# Altium PCB modFOC_ESC.PcbDoc (part 1 of 2)
Units mm, origin at the board's own origin, x right, y up, seen from the top; angles counter-clockwise.
Board outline 82 x 45 mm, 4 copper layers (Top Layer, Mid Layer 1, Mid Layer 2, Bottom Layer), stack 1.531 mm thick; 112 components, 80 nets, 521 pads, 343 vias.
Unrouted connection lines stored in the file: 79.
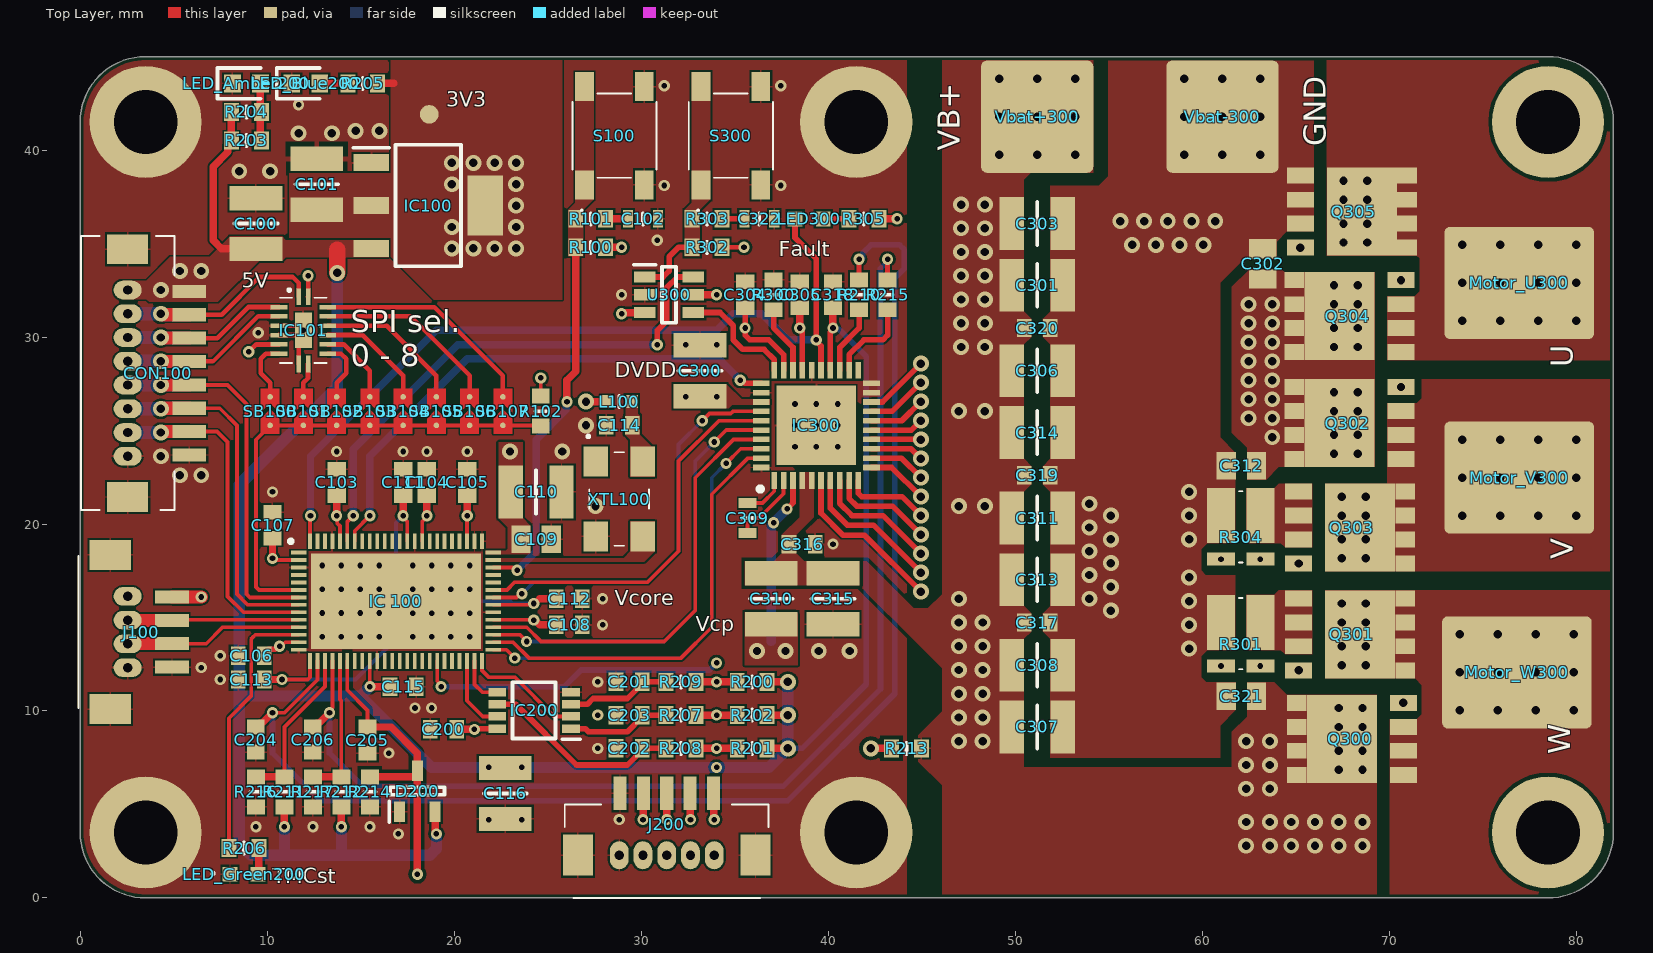
[diagram p0: Top Layer view]
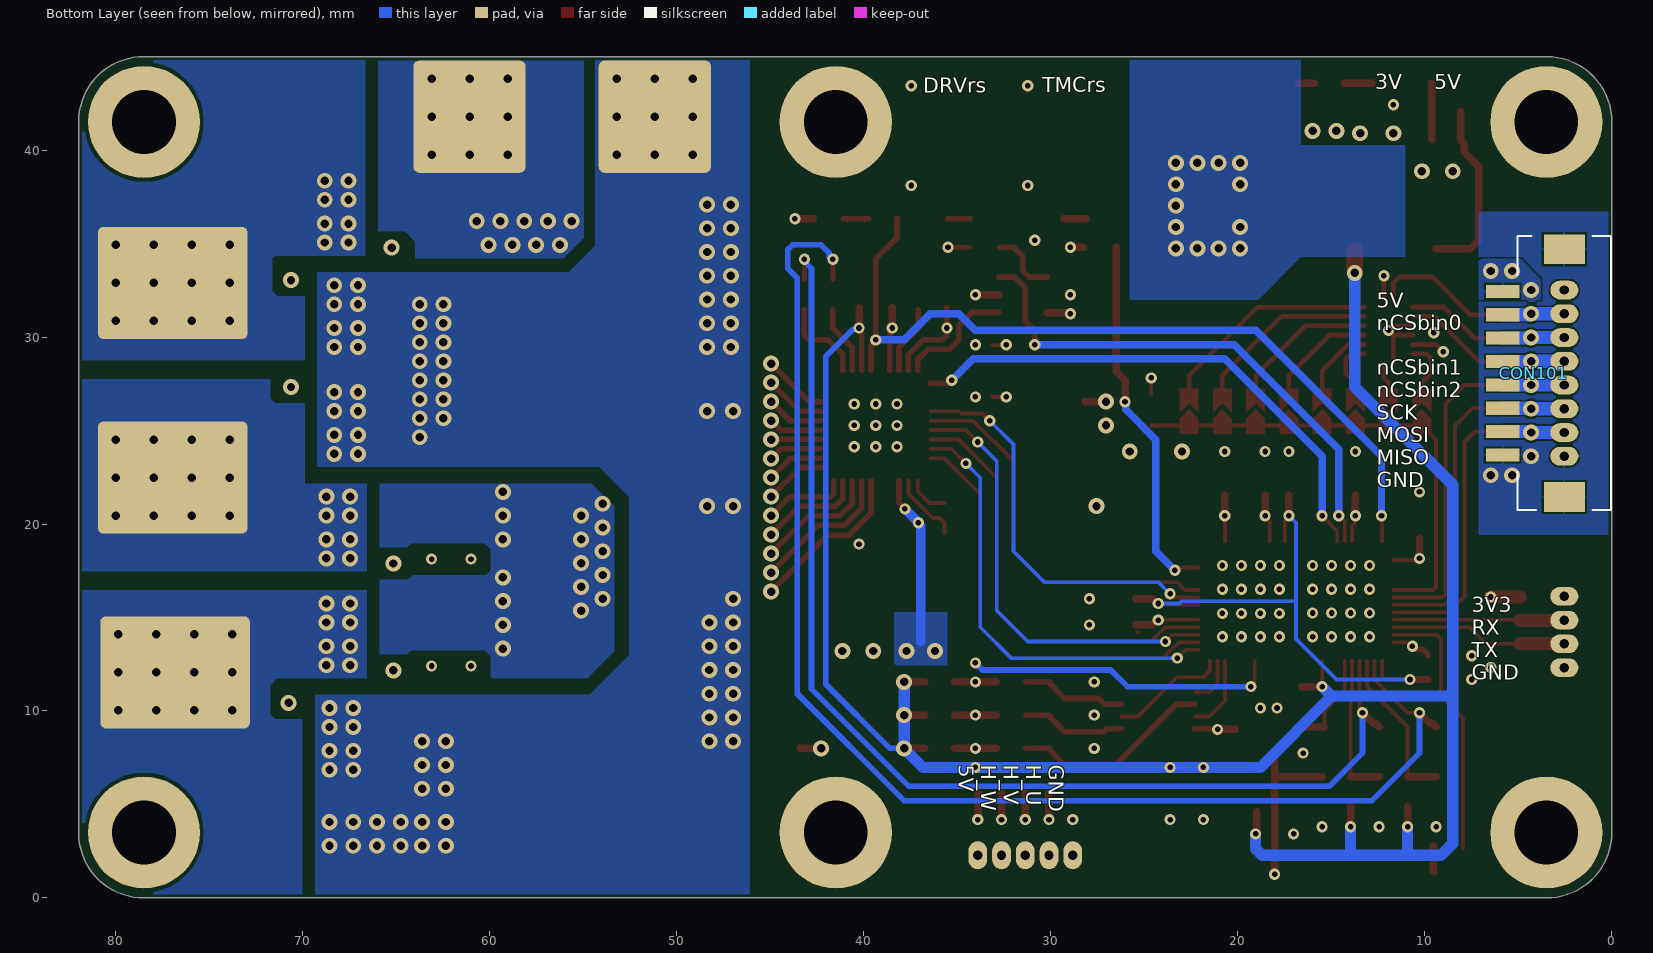
[diagram p1: Bottom Layer view, seen from below]
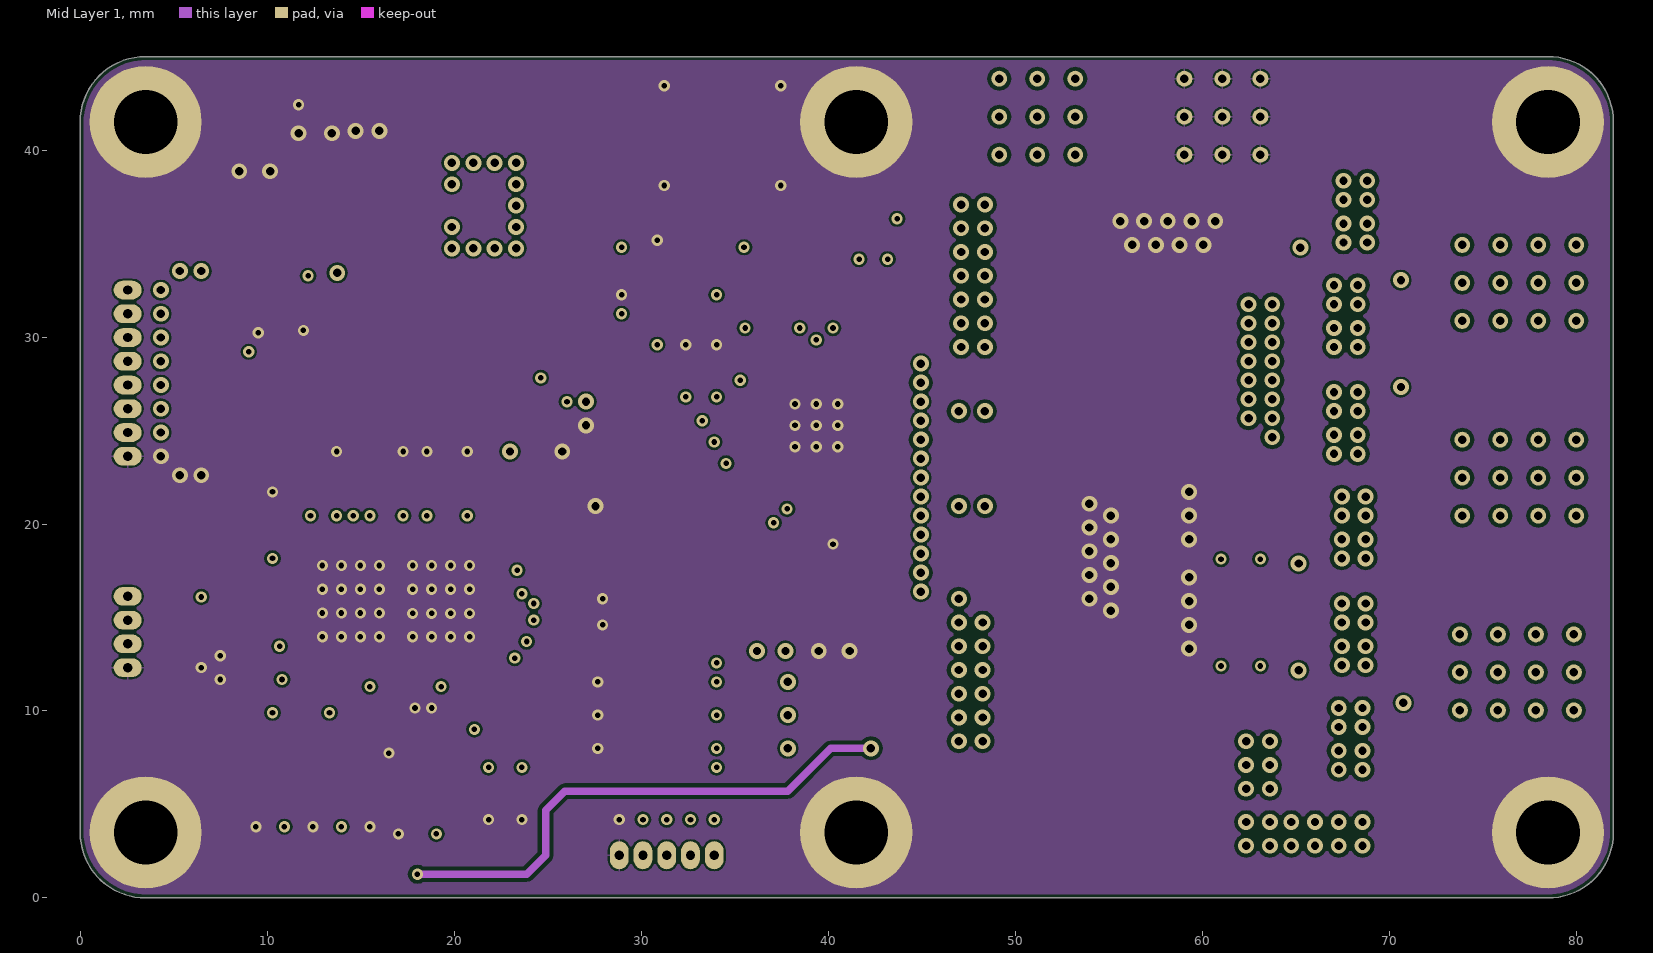
[diagram p2: Mid Layer 1]
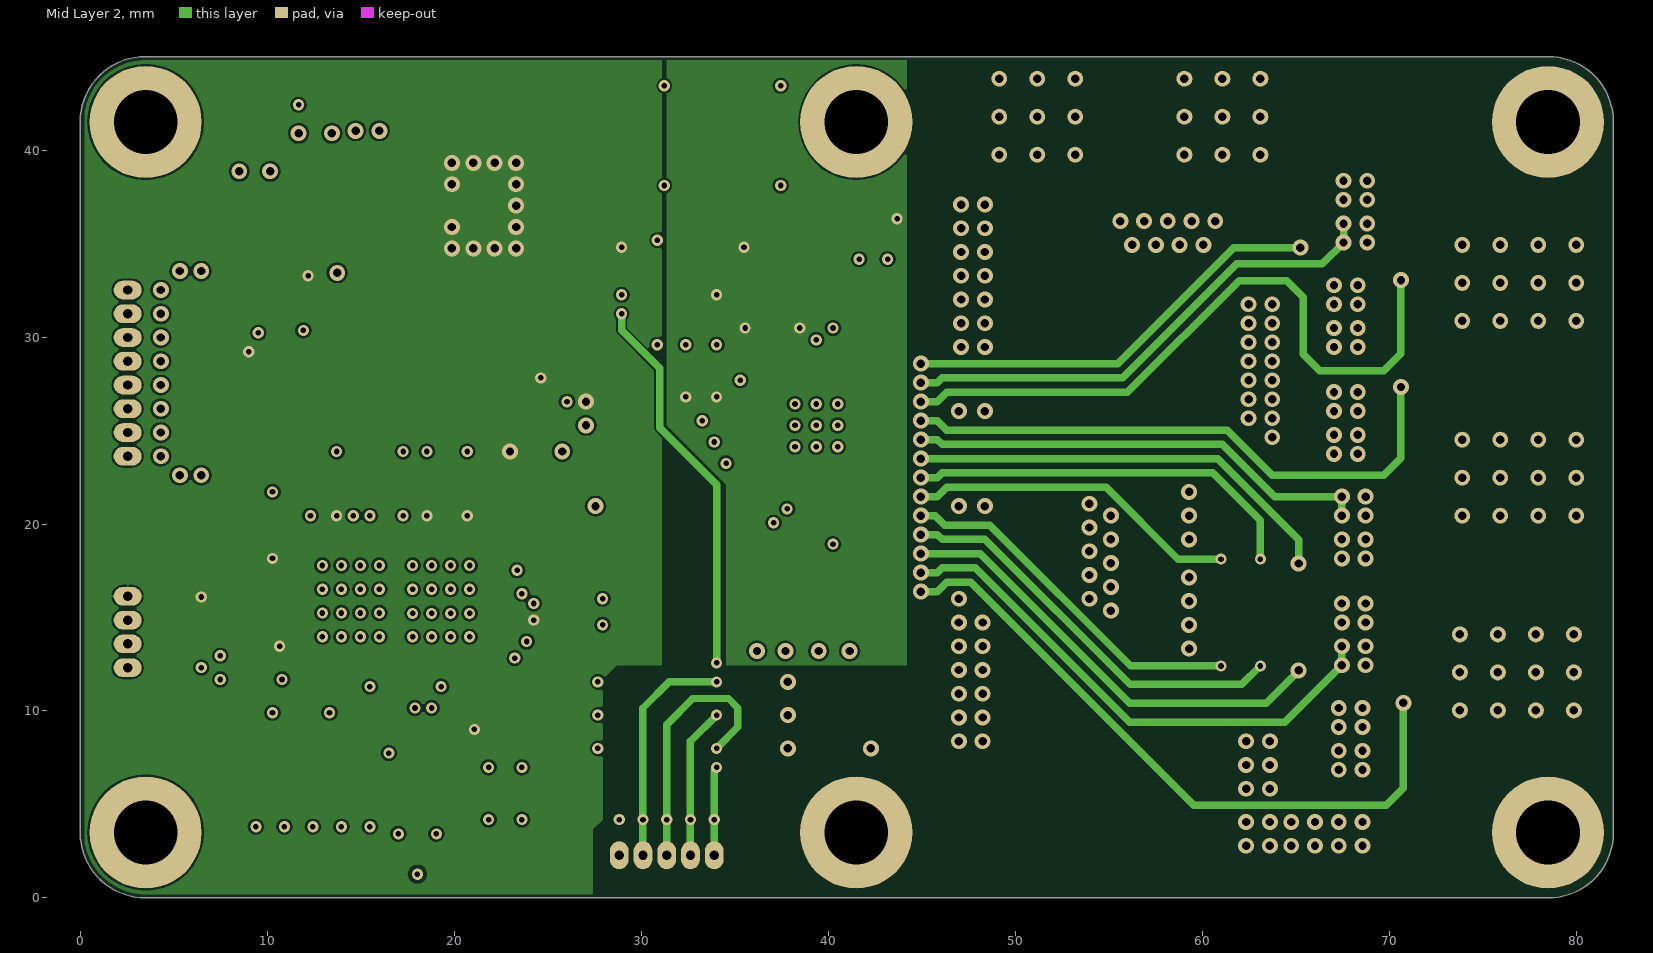
[diagram p3: Mid Layer 2]
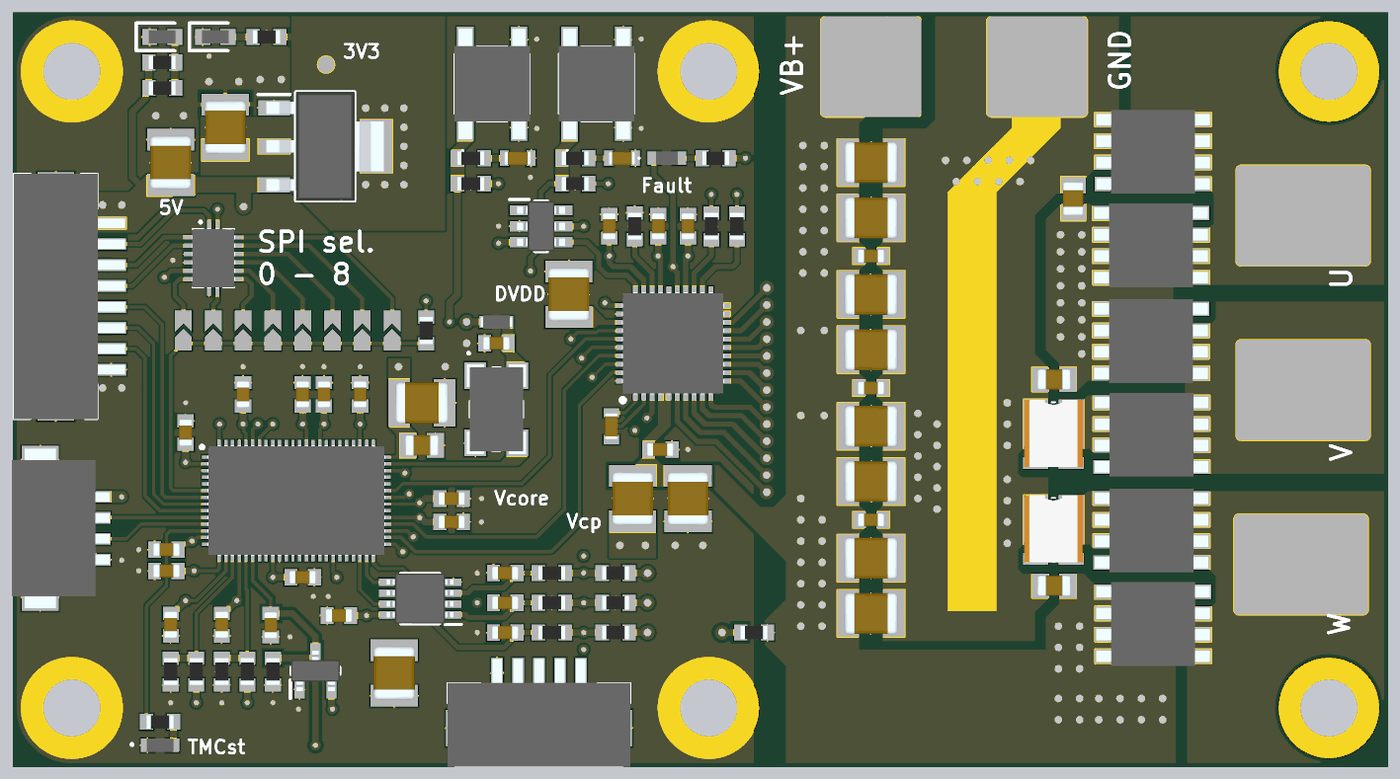
[diagram p5: 3D render of the assembled board from above, using the file's embedded part models]

## Layer stack, top to bottom
Top Solder: solder mask 0.0127, Solder Resist, Dk 3.8
Top Layer: signal copper 0.035
Dielectric 1: prepreg 0.1803, 7628, Dk 4.6
Mid Layer 1: signal copper 0.0175
Core: core 1.065, FR-4, Dk 4.5
Mid Layer 2: signal copper 0.0175
Dielectric 2: prepreg 0.1803, 7628, Dk 4.6
Bottom Layer: signal copper 0.035
Bottom Solder: solder mask 0.0127, Solder Resist, Dk 3.8

## Board outline
0,3.5 ccw(c3.5,3.5) 3.5,0 78.5,0 ccw(c78.5,3.5) 82,3.5 82,41.5 ccw(c78.5,41.5) 78.5,45 3.5,45 ccw(c3.5,41.5) 0,41.5

## Design rules (kind name [scope] priority, off if disabled: settings)
BoardOutlineClearance [All] p1: gap=0.2 ignorepadtopadclearanceinfootprint=FALSE
Clearance Clearance_VB [(InNet('VB+') oR InNet('SHA') oR InNet('SHB') oR InNet('SHC') oR InNet('ADC_VM'))] p1: gap=0.2 ignorepadtopadclearanceinfootprint=FALSE except(0.102: Arc-Arc Arc-Track Arc-SMDPad Arc-THPad Arc-Text Track-Track Track-SMDPad Track-THPad Track-Text SMDPad-SMDPad SMDPad-THPad SMDPad-Text THPad-THPad THPad-Text Text-Text; 0.127: Arc-Via Track-Via SMDPad-Via THPad-Via Via-Via Via-Text; 0.25: Arc-Hole Track-Hole SMDPad-Hole THPad-Hole Via-Hole Text-Hole)
Clearance [All] p2: gap=0.102 ignorepadtopadclearanceinfootprint=FALSE except(0.127: Arc-Via Track-Via SMDPad-Via THPad-Via Via-Via Via-Fill Via-Poly Via-Region Via-Text; 0.25: Arc-Hole Track-Hole SMDPad-Hole THPad-Hole Via-Hole Fill-Hole Poly-Hole Region-Hole Text-Hole)
ComponentClearance [All] p1: gap=0.102 collisioncheckmode=3 verticalgap=0.102 showdistances=TRUE
DiffPairsRouting [All] p1: maxlimit=0.102 minlimit=0.102 mostfreqgap=0.102 toplayer_minwidth=0.102 toplayer_maxwidth=1816.048 toplayer_prefwidth=0.102 midlayer1_minwidth=0.102 midlayer1_maxwidth=1816.048 midlayer1_prefwidth=0.102 midlayer2_minwidth=0.102 midlayer2_maxwidth=1816.048 midlayer2_prefwidth=0.102 bottomlayer_minwidth=0.102 bottomlayer_maxwidth=1816.048 bottomlayer_prefwidth=0.102 maxuncoupledlength=12.7
Height [All] p1: minheight=0 maxheight=1816.048 prefheight=12.7
HoleSize [All] p1: absolutevalues=TRUE maxlimit=6.3 minlimit=0.2 maxpercent=80.000 minpercent=20.000
HoleToHoleClearance [All] p1: gap=0.25 allowstackedmicrovias=FALSE
MinimumAnnularRing [All] p1: minimumring=0.076
MinimumSolderMaskSliver [All] p1: minsoldermaskwidth=0.098
PlaneClearance [All] p1: clearance=0.102
PlaneConnect PlaneConnectPowerPads [InPadClass('PowerPads')] p1: planeconnectstyle=Direct reliefexpansion=0.508 reliefentries=4 reliefconductorwidth=0.254 reliefairgap=0.254
PlaneConnect [All] p2: pad.planeconnectstyle=Relief pad.reliefexpansion=0.3 pad.reliefentries=4 pad.reliefconductorwidth=0.102 pad.reliefairgap=0.102 via.planeconnectstyle=Direct via.reliefexpansion=0.3 via.reliefentries=4 via.reliefconductorwidth=0.127 via.reliefairgap=0.127
PolygonConnect PolygonConnectPowerPads [All vs (InPadClass('PowerPads'))] p1: connectstyle=Direct reliefconductorwidth=0.254 reliefentries=4 polygonreliefangle="90 Angle" airgapwidth=0.254
PolygonConnect [All] p2: thpad.connectstyle=Relief thpad.reliefconductorwidth=0.102 thpad.reliefentries=4 thpad.polygonreliefangle="90 Angle" thpad.airgapwidth=0.102 smdpad.connectstyle=Relief smdpad.reliefconductorwidth=0.102 smdpad.reliefentries=4 smdpad.polygonreliefangle="90 Angle" smdpad.airgapwidth=0.102 via.connectstyle=Direct via.reliefconductorwidth=0.127 via.reliefentries=4 via.polygonreliefangle="90 Angle" via.airgapwidth=0.127
RoutingVias [All] p1: holewidth=0.2 width=0.45 viastyle="Through Hole" minholewidth=0.2 minwidth=0.45 maxholewidth=6.3 maxwidth=6.55
SilkToSilkClearance [All] p1: silktosilkclearance=0
SilkToSolderMaskClearance [IsPad] p1: minsilkscreentomaskgap=0.102 clearancetoexposedcopper=TRUE
SolderMaskExpansion "SolderMaskExpansion Vias" [IsVia] p1: expansion=0.102 istentingtop=TRUE
SolderMaskExpansion [All] p2: expansion=0.05 istentingtop=FALSE
Width [All] p1: maxlimit=50 minlimit=0.102 preferedwidth=0.2 midlayer1_minwidth=0.127 midlayer2_minwidth=0.127 minimp=50.000000 maximp=50.000000 favimp=50.000000
20 further rules are at their usual default settings.

## Classes and differential pairs
component class modFOC-Powerstage: C300 C301 C302 C303 C304 C305 C306 C307 C308 C309 C310 C311 C312 C313 C314 C315 C316 C317 C318 C319 C320 C321 C322 IC300 IC? LED300 Motor_U300 Motor_V300 Motor_W300 Q300 Q301 Q302 Q303 Q304 Q305 R300 R301 R302 R303 R304 R305 RADJ1 RT1 S300 U300 Vbat+300 Vbat-300
component class modFOC-Sensing: C200 C201 C202 C203 C204 C205 C206 D200 IC200 J200 LED_Amber200 LED_Blue200 LED_Green200 R200 R201 R202 R203 R204 R205 R206 R207 R208 R209 R210 R211 R212 R213 R214 R215 R216 R217
component class modFOC-Motion_Controller: C100 C101 C102 C103 C104 C105 C106 C107 C108 C109 C110 C111 C112 C113 C114 C115 C116 CON100 CON101 IC100 IC101 "IC 100" J100 L100 R100 R101 R102 S100 SB100 SB101 SB102 SB103 SB104 SB105 SB106 SB107 XTL100

## Components (designator, comment, footprint, x,y, rotation, side; value= is the part's Value field where it differs from the comment)
C100 "10uF/63V" CAPC3225X280N 9.398,36.068 r90 top
C101 "10uF/63V" CAPC3225X280N 12.656,38.17 r90 top locked
C102 "4u7/10V" CAPC1608X90N 30.099,36.322 r180 top
C103 "100nF/63V" CAPC1608X97N 13.716,22.225 r270 top
C104 "100nF/63V" CAPC1608X97N 18.542,22.225 r270 top
C105 "100nF/63V" CAPC1608X97N 20.701,22.225 r270 top
C106 "100nF/63V" CAPC1608X97N 9.144,12.954 r0 top
C107 "100nF/63V" CAPC1608X97N 10.287,19.939 r270 top
C108 "100nF/63V" CAPC1608X97N 26.162,14.605 r180 top
C109 "470nF/100V" CAPC2012X140N 24.384,19.177 r180 top
C110 "10uF/63V" CAPC3225X280N 24.384,21.717 r0 top
C111 "100nF/63V" CAPC1608X97N 17.272,22.225 r270 top
C112 "100nF/63V" CAPC1608X97N 26.162,16.002 r180 top
C113 "100nF/63V" CAPC1608X97N 9.144,11.684 r0 top
C114 "100nF/63V" CAPC1608X97N 28.829,25.273 r0 top
C115 "100nF/63V" CAPC1608X97N 17.272,11.303 r180 top
C116 "10uF/63V" CAPC3225X280N 22.733,5.588 r270 top
C200 "100nF/63V" CAPC1608X97N 19.431,9.017 r0 top
C201 "1nF/25V" CAPC1608X97N 29.356,11.557 r180 top
C202 "1nF/25V" CAPC1608X97N 29.356,8.001 r180 top
C203 "1nF/25V" CAPC1608X97N 29.356,9.779 r180 top
C204 "100pF/63V" CAPC1608X87N 9.398,8.474 r90 top
C205 "100nF/63V" CAPC1608X97N 15.367,8.444 r90 top
C206 "100pF/63V" CAPC1608X87N 12.446,8.474 r90 top
C300 "10uF/63V" CAPC3225X280N 33.147,28.194 r270 top
C301 "10uF/63V" CAPC3225X280N 51.181,32.766 r180 top
C302 "470nF/100V" CAPC2012X140N 63.246,33.909 r270 top
C303 "10uF/63V" CAPC3225X280N 51.181,36.068 r180 top
C304 "100nF/63V" CAPC1608X97N 35.56,32.258 r270 top
C305 "100nF/63V" CAPC1608X97N 38.481,32.258 r270 top
C306 "10uF/63V" CAPC3225X280N 51.181,28.194 r180 top
C307 "10uF/63V" CAPC3225X280N 51.181,9.144 r180 top
C308 "10uF/63V" CAPC3225X280N 51.181,12.446 r180 top
C309 "47nF/50V" CAPC1608X90N 35.687,20.32 r90 top
C310 "10uF/63V" CAPC3225X280N 36.957,16.002 r270 top
C311 "10uF/63V" CAPC3225X280N 51.181,20.32 r180 top
C312 "470nF/100V" CAPC2012X140N 62.103,23.114 r0 top
C313 "10uF/63V" CAPC3225X280N 51.181,17.018 r180 top
C314 "10uF/63V" CAPC3225X280N 51.181,24.892 r180 top
C315 "10uF/63V" CAPC3225X280N 40.259,16.002 r90 top
C316 "100nF/63V" CAPC1608X97N 38.608,18.923 r180 top
C317 "100nF/63V" CAPC1608X97N 51.181,14.732 r0 top
C318 "100nF/63V" CAPC1608X97N 40.259,32.258 r270 top
C319 "100nF/63V" CAPC1608X97N 51.181,22.606 r0 top
C320 "100nF/63V" CAPC1608X97N 51.181,30.48 r0 top
C321 "470nF/100V" CAPC2012X140N 62.103,10.795 r0 top
C322 "4u7/10V" CAPC1608X90N 36.322,36.322 r180 top
CON100 "8_PIN" DF13A8P125H21 2.54,28.067 r90 top
CON101 "8_PIN" DF13A8P125H21 2.54,28.067 r270 bottom
D200 "30V/200mA" SOT95P240X110-3N 18.034,5.715 r90 top
IC100 "3V3_LDO" SOT230P700X180-4N 18.613,37.028 r0 top
IC101 "3Bit_BIN/DEC" 74HCT595BQ115 11.938,30.353 r270 top
IC200 "S-Trigger" SOP65P400X110-8N 24.276,10.033 r180 top
IC300 "BLDC_GDriver" QFN50P600X600X80-41N-D 39.37,25.273 r90 top
"IC 100" "Motion Ctrl" QFN40P1050X650X90-77N 16.891,15.875 r0 top
J100 "4_PIN" DF13A4P125H21 2.413,14.224 r90 top
J200 "5_PIN" DF13A5P125H21 31.369,2.794 r180 top
L100 "30R@100MHz/5A" BLM18KG101TH1D 28.829,26.543 r0 top
LED300 "RED/2,2V/2mA" LSL29KG1J21Z 38.989,36.322 r0 top
LED_Amber200 "AMBER/2V/20mA" LEDC1608X55N 8.89,43.561 r0 top
LED_Blue200 "BLUE/2,85V/5mA" LEDC1608X40N 12.065,43.561 r0 top
LED_Green200 "GREEN/2,4V/20mA" LGQ396PS35 8.763,1.27 r0 top
Motor_U300 "PowerPad" POWER_PAD 76.962,32.893 r180 top
Motor_V300 "PowerPad" POWER_PAD 76.962,22.479 r180 top
Motor_W300 "PowerPad" POWER_PAD 76.835,12.065 r180 top
Q300 "N-ch/60V/100A" TPHR9003NLL1Q 68.453,8.509 r90 top
Q301 "N-ch/60V/100A" TPHR9003NLL1Q 67.472,14.097 r270 top
Q302 "N-ch/60V/100A" TPHR9003NLL1Q 68.326,25.4 r90 top
Q303 "N-ch/60V/100A" TPHR9003NLL1Q 67.472,19.812 r270 top
Q304 "N-ch/60V/100A" TPHR9003NLL1Q 68.326,31.115 r90 top
Q305 "N-ch/60V/100A" TPHR9003NLL1Q 67.564,36.703 r270 top
R100 "10k" RESC1608X55N 27.305,34.798 r180 top
R101 "100R" RESC1608X55N 27.305,36.322 r0 top
R102 "10k" RESC1608X55N 24.638,26.035 r90 top
R200 "4k7" RESC1608X55N 35.941,11.557 r180 top
R201 "4k7" RESC1608X55N 35.941,8.001 r180 top
R202 "4k7" RESC1608X55N 35.941,9.779 r180 top
R203 "1k5" RESC1608X55N 8.89,40.513 r180 top
R204 "1k5" RESC1608X55N 8.89,42.037 r180 top
R205 "100R" RESC1608X55N 15.113,43.561 r0 top
R206 "150R" RESC1608X55N 8.763,2.667 r180 top
R207 "4k7" RESC1608X55N 32.131,9.779 r180 top
R208 "4k7" RESC1608X55N 32.131,8.001 r180 top
R209 "4k7" RESC1608X55N 32.131,11.557 r180 top
R210 "100R" RESC1608X55N 41.656,32.258 r270 top
R211 "10k" RESC1608X55N 10.922,5.677 r270 top
R212 "10k" RESC1608X55N 13.97,5.677 r90 top
R213 "100k" RESC1608X55N 44.196,8.001 r0 top
R214 "1k5" RESC1608X55N 15.494,5.677 r90 top
R215 "100R" RESC1608X55N 43.18,32.258 r270 top
R216 "10k" RESC1608X55N 9.398,5.677 r270 top
R217 "10k" RESC1608X55N 12.446,5.677 r270 top
R300 "1M" RESC1608X55N 37.084,32.258 r90 top
R301 "5mR/3W" WSK12161L000FEA 62.066,14.132 r270 top
R302 "10k" RESC1608X55N 33.528,34.798 r180 top
R303 "100R" RESC1608X55N 33.528,36.322 r0 top
R304 "5mR/3W" WSK12161L000FEA 62.066,19.847 r270 top
R305 "470R" RESC1608X55N 41.91,36.322 r0 top
S100 "OFF-(ON)" PTS647SK38SMTR2LFS 28.575,40.767 r90 top
S300 "OFF-(ON)" PTS647SK38SMTR2LFS 34.798,40.767 r90 top
SB100 "Solder Bridge" SOLDER-BRIDGE_R0603-0R 10.16,26.035 r90 top
SB101 "Solder Bridge" SOLDER-BRIDGE_R0603-0R 11.938,26.035 r90 top
SB102 "Solder Bridge" SOLDER-BRIDGE_R0603-0R 13.716,26.035 r90 top
SB103 "Solder Bridge" SOLDER-BRIDGE_R0603-0R 15.494,26.035 r90 top
SB104 "Solder Bridge" SOLDER-BRIDGE_R0603-0R 17.272,26.035 r90 top
SB105 "Solder Bridge" SOLDER-BRIDGE_R0603-0R 19.05,26.035 r90 top
SB106 "Solder Bridge" SOLDER-BRIDGE_R0603-0R 20.828,26.035 r90 top
SB107 "Solder Bridge" SOLDER-BRIDGE_R0603-0R 22.606,26.035 r90 top
U300 "Triple_AND" SOT95P285X140-6N 31.496,32.258 r0 top
Vbat+300 "PW_PAD_SMOL" PW_PAD_SMOL 51.181,41.783 r0 top
Vbat-300 "PW_PAD_SMOL" PW_PAD_SMOL 61.087,41.783 r0 top
XTL100 "25MHz" FOX924B25 28.829,21.336 r270 top

## Footprints (in the part's own frame and the unit in brackets; to place one, negate y for a bottom-side part, rotate by r counter-clockwise, add the part's x,y. Pads: shape width x height; smd on the part's side, far side on the other; paste and mask are expansions set on the pad)
74HCT595BQ115 [mm]
  rect 0.9x0.24 smd: 1(-1.8,-0.25) 8(1.8,-0.25) 9(1.8,0.25) 16(-1.8,0.25)
  rect 0.24x0.9 smd: 2(-1.25,-1.3) 3(-0.75,-1.3) 4(-0.25,-1.3) 5(0.25,-1.3) 6(0.75,-1.3) 7(1.25,-1.3) 10(1.25,1.3) 11(0.75,1.3) 12(0.25,1.3) 13(-0.25,1.3) 14(-0.75,1.3) 15(-1.25,1.3)
  rect 1.9x0.9 smd: 17(0,0)
  silkscreen extent -2.21,-1.25 1.75,1.25, body extent -1.8,-1.3 1.8,1.3, height 1
BLM18KG101TH1D [mm]
  rect 0.65x0.7 smd: 1(-0.675,0) 2(0.675,0)
  silkscreen extent 0,-0.3 0,0.3, body extent -0.93,-0.4 0.93,0.4, height 0.85
CAPC1608X87N [mm]
  rect 0.8x0.94 smd: 1(-0.67,0) 2(0.67,0)
  body extent -0.8,-0.4 0.8,0.4, height 0.87
CAPC1608X90N [mm]
  rect 0.54x0.94 smd: 1(-0.8,0) 2(0.8,0)
  silkscreen extent 0,-0.3 0,0.3, body extent -0.8,-0.4 0.8,0.4, height 0.9
CAPC1608X97N [mm]
  rect 0.78x0.98 smd: 1(-0.7,0) 2(0.7,0)
  body extent -0.8,-0.4 0.8,0.4, height 0.97
CAPC2012X140N [mm]
  rect 1.02x1.47 smd: 1(-0.81,0) 2(0.81,0)
  body extent -1,-0.63 1,0.63, height 1.4
CAPC3225X280N [mm]
  rect 1.3x2.82 smd: 1(-1.36,0) 2(1.36,0)
  silkscreen extent 0,-1.15 0,1.15, body extent -1.6,-1.25 1.6,1.25, height 2.8
DF13A4P125H21 [mm]
  rect 0.7x1.8 smd: 1(1.875,-2.5) 2(0.625,-2.5) 3(-0.625,-2.5) 4(-1.875,-2.5)
  rect 1.6x2.2 smd: MP1(-4.125,0.8) MP2(4.125,0.8)
  silkscreen extent -4.08,2.5 4.08,2.5, body extent -4.76,-3.33 4.76,2.5, height 3.7
DF13A5P125H21 [mm]
  rect 0.7x1.8 smd: 1(2.5,-2.8) 2(1.25,-2.8) 3(0,-2.8) 4(-1.25,-2.8) 5(-2.5,-2.8)
  rect 1.6x2.2 smd: MP1(-4.75,0.5) MP2(4.75,0.5)
  silkscreen extent -5.45,-2.2 5.45,2.8, body extent -5.45,-3.63 5.45,2.8, height 3.85
DF13A8P125H21 [mm]
  rect 0.7x1.8 smd: 1(4.375,-3.3) 2(3.125,-3.3) 3(1.875,-3.3) 4(0.625,-3.3) 5(-0.625,-3.3) 6(-1.875,-3.3) 7(-3.125,-3.3) 8(-4.375,-3.3)
  rect 1.6x2.2 smd: MP1(-6.625,0) MP2(6.625,0)
  silkscreen extent -7.32,-2.5 7.32,2.5, body extent -7.32,-4.13 7.32,2.5, height 3.7
FOX924B25 [mm]
  rect 1.6x1.3 smd: 1(-2,-1.25) 2(2,-1.25) 3(2,1.25) 4(-2,1.25)
  silkscreen extent -3.4,-1.7 2.5,1.6, body extent -2.67,-1.77 2.67,1.77, height 1.6
LEDC1608X40N [mm]
  rect 0.9x0.95 smd: 1(-0.75,0) 2(0.75,0)
  silkscreen extent -1.55,-0.82 0.75,0.82, body extent -0.8,-0.4 0.8,0.4, height 0.5
LEDC1608X55N [mm]
  rect 0.9x0.95 smd: 1(-0.75,0) 2(0.75,0)
  silkscreen extent -1.55,-0.82 0.75,0.82, body extent -0.8,-0.4 0.8,0.4, height 0.5
LGQ396PS35 [mm]
  rect 0.8x0.8 smd: 1(-0.75,0) 2(0.75,0)
  silkscreen extent -1.72,0 -1.62,0.1, body extent -0.8,-0.4 0.8,0.4, height 0.5
LSL29KG1J21Z [mm]
  rect 0.8x0.8 smd: 1(-0.75,0) 2(0.75,0)
  silkscreen extent -1.7,-0.05 -1.6,0.05, body extent -0.65,-0.4 0.65,0.4, height 0.77
POWER_PAD [mm]
  round 0.85 hole 0.45: 1(-3.048,2.032) 1(-3.048,0) 1(-3.048,-2.032) 1(-1.016,2.032) 1(-1.016,0) 1(-1.016,-2.032) 1(1.016,2.032) 1(1.016,0) 1(1.016,-2.032) 1(3.048,2.032) 1(3.048,0) 1(3.048,-2.032)
  rrect10% 8x6 smd: 1(0,0)
  rrect10% 8x6 smd far side: 1(0,0)
PTS647SK38SMTR2LFS [mm]
  rect 1.55x1 smd: 1(-2.625,1.6) 2(2.625,1.6) 3(-2.625,-1.6) 4(2.625,-1.6)
  silkscreen extent -4.05,-2.25 2.25,2.25, body extent -3.3,-2.25 3.3,2.25, height 3.9
PW_PAD_SMOL [mm]
  round 0.85 hole 0.45: 1(-2.032,-2.032) 1(-2.032,0) 1(-2.032,2.032) 1(0,-2.032) 1(0,0) 1(0,2.032) 1(2.032,-2.032) 1(2.032,0) 1(2.032,2.032)
  rrect10% 6x6 smd: 1(0,0)
  rrect10% 6x6 smd far side: 1(0,0)
QFN40P1050X650X90-77N [mm]
  rect 0.85x0.2 smd: 1(-5.2,2.6) 2(-5.2,2.2) 3(-5.2,1.8) 4(-5.2,1.4) 5(-5.2,1) 6(-5.2,0.6) 7(-5.2,0.2) 8(-5.2,-0.2) 9(-5.2,-0.6) 10(-5.2,-1) 11(-5.2,-1.4) 12(-5.2,-1.8) 13(-5.2,-2.2) 14(-5.2,-2.6) 39(5.2,-2.6) 40(5.2,-2.2) 41(5.2,-1.8) 42(5.2,-1.4) 43(5.2,-1) 44(5.2,-0.6) 45(5.2,-0.2) 46(5.2,0.2) 47(5.2,0.6) 48(5.2,1) 49(5.2,1.4) 50(5.2,1.8) 51(5.2,2.2) 52(5.2,2.6)
  rect 0.2x0.85 smd: 15(-4.6,-3.2) 16(-4.2,-3.2) 17(-3.8,-3.2) 18(-3.4,-3.2) 19(-3,-3.2) 20(-2.6,-3.2) 21(-2.2,-3.2) 22(-1.8,-3.2) 23(-1.4,-3.2) 24(-1,-3.2) 25(-0.6,-3.2) 26(-0.2,-3.2) 27(0.2,-3.2) 28(0.6,-3.2) 29(1,-3.2) 30(1.4,-3.2) 31(1.8,-3.2) 32(2.2,-3.2) 33(2.6,-3.2) 34(3,-3.2) 35(3.4,-3.2) 36(3.8,-3.2) 37(4.2,-3.2) 38(4.6,-3.2) 53(4.6,3.2) 54(4.2,3.2) 55(3.8,3.2) 56(3.4,3.2) 57(3,3.2) 58(2.6,3.2) 59(2.2,3.2) 60(1.8,3.2) 61(1.4,3.2) 62(1,3.2) 63(0.6,3.2) 64(0.2,3.2) 65(-0.2,3.2) 66(-0.6,3.2) 67(-1,3.2) 68(-1.4,3.2) 69(-1.8,3.2) 70(-2.2,3.2) 71(-2.6,3.2) 72(-3,3.2) 73(-3.4,3.2) 74(-3.8,3.2) 75(-4.2,3.2) 76(-4.6,3.2)
  rect 9.1x5.1 smd: 77(0,0)
  silkscreen extent -5.72,3.1 -5.53,3.3, body extent -5.3,-3.3 5.3,3.3, height 0.9
QFN50P600X600X80-41N-D [mm]
  rect 0.9x0.3 smd: 1(-2.95,2.25) 2(-2.95,1.75) 3(-2.95,1.25) 4(-2.95,0.75) 5(-2.95,0.25) 6(-2.95,-0.25) 7(-2.95,-0.75) 8(-2.95,-1.25) 9(-2.95,-1.75) 10(-2.95,-2.25) 21(2.95,-2.25) 22(2.95,-1.75) 23(2.95,-1.25) 24(2.95,-0.75) 25(2.95,-0.25) 26(2.95,0.25) 27(2.95,0.75) 28(2.95,1.25) 29(2.95,1.75) 30(2.95,2.25)
  rect 0.3x0.9 smd: 11(-2.25,-2.95) 12(-1.75,-2.95) 13(-1.25,-2.95) 14(-0.75,-2.95) 15(-0.25,-2.95) 16(0.25,-2.95) 17(0.75,-2.95) 18(1.25,-2.95) 19(1.75,-2.95) 20(2.25,-2.95) 31(2.25,2.95) 32(1.75,2.95) 33(1.25,2.95) 34(0.75,2.95) 35(0.25,2.95) 36(-0.25,2.95) 37(-0.75,2.95) 38(-1.25,2.95) 39(-1.75,2.95) 40(-2.25,2.95)
  rect 4.25x4.25 smd: 41(0,0)
  silkscreen extent -3.52,2.87 -3.28,3.12, body extent -3.05,-3.05 3.05,3.05, height 0.8
RESC1608X55N [mm]
  rect 0.8x0.95 smd: 1(-0.8,0) 2(0.8,0)
  silkscreen extent 0,-0.3 0,0.3, body extent -0.8,-0.4 0.8,0.4, height 0.55
SOLDER-BRIDGE_R0603-0R [mm]
  round 0.3 smd: 1(-0.762,0) 2(0.762,0)
  Top Layer region: -0.068,-0.5 0.432,0 -0.068,0.5 1.2,0.5 1.2,-0.5
  Top Layer region: -1.2,0.5 -1.2,-0.5 -0.4,-0.5 0.1,0 -0.4,0.5 -1.2,0.5
SOP65P400X110-8N [mm]
  rect 0.95x0.45 smd: 1(-1.975,0.975) 2(-1.975,0.325) 3(-1.975,-0.325) 4(-1.975,-0.975) 5(1.975,-0.975) 6(1.975,-0.325) 7(1.975,0.325) 8(1.975,0.975)
  silkscreen extent -2.45,-1.5 1.15,1.55, body extent -2,-1.5 2,1.5, height 1.1
SOT95P240X110-3N [mm]
  rect 1.1x0.6 smd: 1(-1.1,0.95) 2(-1.1,-0.95) 3(1.1,0)
  silkscreen extent -1.65,-1.45 0.2,1.5, body extent -1.2,-1.45 1.2,1.45, height 1.1
SOT95P285X140-6N [mm]
  rect 1.15x0.6 smd: 1(-1.3,0.95) 2(-1.3,0) 3(-1.3,-0.95) 4(1.3,-0.95) 5(1.3,0) 6(1.3,0.95)
  silkscreen extent -1.88,-1.5 0.38,1.6, body extent -1.43,-1.5 1.43,1.5, height 1.4
SOT230P700X180-4N [mm]
  rect 1.9x0.9 smd: 1(-3.05,2.3) 2(-3.05,0) 3(-3.05,-2.3)
  rect 1.9x3.2 smd: 4(3.05,0)
  silkscreen extent -4,-3.25 1.75,3.25, body extent -3.5,-3.25 3.5,3.25, height 1.8
TPHR9003NLL1Q [mm]
  rect 0.85x1.45 smd: 1(-1.925,-2.309) 2(-0.635,-2.309) 3(0.635,-2.309) 4(1.925,-2.309)
  rect 0.85x1.05 smd: 5(1.925,3.391) 6(0.635,3.391) 7(-0.635,3.391) 8(-1.925,3.391)
  rect 4.7x3.75 smd: 9(0,0.981)
  body extent -2.5,-2.95 2.5,3.83, height 1.1
WSK12161L000FEA [mm]
  rect 2.95x1.495 smd: 1(-0.6,-1.053) 4(-0.6,1.053)
  rect 0.7x1.495 smd: 2(1.725,-1.053) 3(1.725,1.053)
  silkscreen extent -1.91,-0.1 1.9,0.1, body extent -2.06,-1.75 1.95,1.75, height 1.51

## Part data
C100 C101 C110 C116 C300 C301 C303 C306 C307 C308 C310 C311 C313 C314 C315: library part CL32B106KMVNNWE, "Capacitor", Manufacturer_Name="Samsung Electro-Mechanics", Mouser Part Number=187-CL32B106KMVNNWE, Arrow Part Number=CL32B106KMVNNWE, Arrow Price/Stock=https://www.arrow.com/en/products/cl32b106kmvnnwe/samsung-electro-mechanics, Datasheet Link=https://www.arrow.com/en/products/cl32b106kmvnnwe/samsung-electro-mechanics, Height=2.8mm, Manufacturer_Part_Number=CL32B106KMVNNWE, Mouser Price/Stock=https://www.mouser.co.uk/ProductDetail/Samsung-Electro-Mechanics/CL32B106KMVNNWE?qs=xZ%2FP%252Ba9zWqaEMBbSgKy8gQ%3D%3D
C102 C322: library part CL10A475KP8NNNC, "Capacitor", Manufacturer_Name="Samsung Electro-Mechanics", Mouser Part Number=187-CL10A475KP8NNNC, Arrow Part Number=CL10A475KP8NNNC, Arrow Price/Stock=https://www.arrow.com/en/products/cl10a475kp8nnnc/samsung-electro-mechanics, Datasheet Link=https://www.arrow.com/en/products/cl10a475kp8nnnc/samsung-electro-mechanics, Height=0.9mm, Manufacturer_Part_Number=CL10A475KP8NNNC, Mouser Price/Stock=https://www.mouser.co.uk/ProductDetail/Samsung-Electro-Mechanics/CL10A475KP8NNNC/?qs=hqM3L16%252BxlfQRmkWsZz5vA%3D%3D
C103 C104 C105 C106 C107 C108 C111 C112 C113 C114 C115 C200 C205 C304 C305 C316 C317 C318 C319 C320: library part C0805C104MMREC7210, "Capacitor", Manufacturer_Name=Vishay, Manufacturer_Part_Number=VJ0603Y104JXJAC, Mouser Part Number=77-VJ0603Y104JXJAC, Datasheet Link=http://www.vishay.com/docs/45226/vj31xrohsautomlcc.pdf, Height=1mm, Mouser Price/Stock=https://www.mouser.com/Search/Refine.aspx?Keyword=77-VJ0603Y104JXJAC
C109 C302 C312 C321: library part 08051C474KAT2A, "Capacitor", Manufacturer_Name=AVX, Mouser Part Number=581-08051C474KAT2A, Datasheet Link=http://datasheets.avx.com/X7RDielectric.pdf, Height=1.4mm, Manufacturer_Part_Number=08051C474KAT2A, Mouser Price/Stock=https://www.mouser.co.uk/ProductDetail/AVX/08051C474KAT2A?qs=%2FjdEcI0p95Mz%2FN5KbrGN6Q%3D%3D
C201 C202 C203: library part GRM033R71E102KA01D, "Capacitor", Manufacturer_Name="Murata Electronics", Mouser Part Number=81-GRM033R71E102KA1D, Arrow Part Number=GRM033R71E102KA01D, Arrow Price/Stock=https://www.arrow.com/en/products/grm033r71e102ka01d/murata-manufacturing, Datasheet Link=https://psearch.en.murata.com/capacitor/product/GRM033R71E102KA01%23.html, Height=0.33mm, Manufacturer_Part_Number=GRM033R71E102KA01D, Mouser Price/Stock=https://www.mouser.co.uk/ProductDetail/Murata-Electronics/GRM033R71E102KA01D/?qs=%252BwCMEOx2S5vqymn%2Fc34U1A%3D%3D
C204 C206: library part C0603C101K1HACTU, "Capacitor", Manufacturer_Name=Kemet, Mouser Part Number=80-C0603C101K1HACTU, Datasheet Link=https://www.mouser.com/datasheet/2/212/KEM_C1007_X8R_ULTRA_150C_SMD-1102703.pdf, Height=0.87mm, Manufacturer_Part_Number=C0603C101K1HACTU, Mouser Price/Stock=https://www.mouser.co.uk/ProductDetail/KEMET/C0603C101K1HACTU?qs=W0yvOO0ixfE5G01qpfeqIQ%3D%3D
C309: library part CGA3E2X7R1H473K080AA, "Capacitor", Manufacturer_Name=TDK, Mouser Part Number=810-CGA3E2X7R1H473K, Arrow Part Number=CGA3E2X7R1H473K080AA, Arrow Price/Stock=https://www.arrow.com/en/products/cga3e2x7r1h473k080aa/tdk, Datasheet Link=http://docs-emea.rs-online.com/webdocs/14e9/0900766b814e9125.pdf, Height=0.9mm, Manufacturer_Part_Number=CGA3E2X7R1H473K080AA, Mouser Price/Stock=https://www.mouser.co.uk/ProductDetail/TDK/CGA3E2X7R1H473K080AA?qs=NRhsANhppD%252BXNlr9LoLgTw%3D%3D
CON100 CON101: library part DF13A-8P-1.25H_21_, "Connector", Manufacturer_Name=Hirose, Manufacturer_Part_Number=DF13A-8P-1.25H(21), Mouser Part Number=798-DF13A8P125H21, Datasheet Link=http://uk.rs-online.com/web/p/products/7793617P, Height=3.6mm, Mouser Price/Stock=https://www.mouser.co.uk/ProductDetail/Hirose-Connector/DF13A-8P-125H21?qs=XQjbzJWzFPViW0MGk5%2FVbA%3D%3D
D200: library part BAT54S, "Schottky Diode", Manufacturer_Name=Rectron, Mouser Part Number=583-BAT54S, Arrow Part Number=BAT54S, Arrow Price/Stock=https://www.arrow.com/en/products/bat54s/rectron, Datasheet Link=https://www.rectron.com/data_sheets/bat54s.pdf, Height=1.1mm, Manufacturer_Part_Number=BAT54S, Mouser Price/Stock=https://www.mouser.co.uk/ProductDetail/Rectron/BAT54S?qs=7pEAo90IqNGRiqD7TkybWA%3D%3D
IC100: library part AP2114H-3.3TRG1, "Integrated Circuit", Manufacturer_Name="Diodes Inc.", Mouser Part Number=621-AP2114H-3.3TRG1, Arrow Part Number=AP2114H-3.3TRG1, Arrow Price/Stock=https://www.arrow.com/en/products/ap2114h-3.3trg1/diodes-incorporated, Datasheet Link=http://uk.rs-online.com/web/p/products/8283528, Height=1.8mm, Manufacturer_Part_Number=AP2114H-3.3TRG1, Mouser Price/Stock=https://www.mouser.co.uk/ProductDetail/Diodes-Incorporated/AP2114H-33TRG1?qs=x6A8l6qLYDDSG%2FfwzcsOhw%3D%3D
IC101: library part 74LVC138ABQ,115, "Integrated Circuit", Manufacturer_Name=Nexperia, Mouser Part Number=771-LVC138ABQ115, Arrow Part Number=74LVC138ABQ,115, Arrow Price/Stock=https://www.arrow.com/en/products/74lvc138abq115/nexperia, Datasheet Link=https://assets.nexperia.com/documents/data-sheet/74LVC138A.pdf, Manufacturer_Part_Number=74LVC138ABQ,115, Mouser Price/Stock=https://www.mouser.co.uk/ProductDetail/Nexperia/74LVC138ABQ115?qs=me8TqzrmIYUqHGpwzmLq4w%3D%3D
IC200: library part 74LVC3G17DP,125, "Integrated Circuit", Manufacturer_Name=Nexperia, Mouser Part Number=771-LVC3G17DP125, Arrow Part Number=74LVC3G17DP,125, Arrow Price/Stock=https://www.arrow.com/en/products/74lvc3g17dp125/nexperia, Datasheet Link=https://assets.nexperia.com/documents/data-sheet/74LVC3G17.pdf, Height=1.1mm, Manufacturer_Part_Number=74LVC3G17DP,125, Mouser Price/Stock=https://www.mouser.co.uk/ProductDetail/Nexperia/74LVC3G17DP125?qs=me8TqzrmIYUUngWcw0uHGA%3D%3D
IC300: library part DRV8323HRTAR, "Integrated Circuit", Manufacturer_Name="Texas Instruments", Mouser Part Number=595-DRV8323HRTAR, Arrow Part Number=DRV8323HRTAR, Arrow Price/Stock=https://www.arrow.com/en/products/drv8323hrtar/texas-instruments, Datasheet Link=http://www.ti.com/lit/gpn/drv8323, Height=0.8mm, Manufacturer_Part_Number=DRV8323HRTAR, Mouser Price/Stock=https://www.mouser.co.uk/ProductDetail/Texas-Instruments/DRV8323HRTAR?qs=u4fy%2FsgLU9N%252BsI8bz2iwaQ%3D%3D
"IC 100": library part "TMC4671-LA IC", "FOC Motion Controller"
J100: library part DF13A-4P-1.25H_21_, "Connector", Manufacturer_Name=Hirose, Manufacturer_Part_Number=DF13A-4P-1.25H(21), Mouser Part Number=798-DF13A4P125H21, Datasheet Link=https://componentsearchengine.com/Datasheets/1/DF13A-4P-1.25H(21).pdf, Height=3.6mm, Mouser Price/Stock=https://www.mouser.co.uk/ProductDetail/Hirose-Connector/DF13A-4P-125H21/?qs=XQjbzJWzFPXWzMShI70F0w%3D%3D
J200: library part DF13A-5P-1.25H_21_, "Connector", Manufacturer_Name=Hirose, Manufacturer_Part_Number=DF13A-5P-1.25H(21), Mouser Part Number=798-DF13A5P125H21, Datasheet Link=https://componentsearchengine.com/Datasheets/1/DF13A-5P-1.25H(21).pdf, Height=3.75mm, Mouser Price/Stock=https://www.mouser.co.uk/ProductDetail/Hirose-Connector/DF13A-5P-125H21?qs=XQjbzJWzFPWvJsE2o%252B4Q8Q%3D%3D
L100: library part BLM18KG300TH1D, "Ferrite Bead", Manufacturer_Name="Murata Electronics", Mouser Part Number=81-BLM18KG300TH1D, Arrow Part Number=BLM18KG300TH1D, Arrow Price/Stock=https://www.arrow.com/en/products/blm18kg300th1d/murata-manufacturing, Datasheet Link=https://www.murata.com/en-us/products/productdetail?partno=BLM18KG300TH1%23, Height=0.75mm, Manufacturer_Part_Number=BLM18KG300TH1D, Mouser Price/Stock=https://www.mouser.com/Search/Refine.aspx?Keyword=81-BLM18KG300TH1D
LED300: library part LS_L29K-G1J2-1-Z, "LED", Manufacturer_Name=OSRAM, Manufacturer_Part_Number="LS L29K-G1J2-1-Z", Mouser Part Number=720-LSL29K-G1J2-1-Z, Datasheet Link=https://dammedia.osram.info/media/resource/hires/osram-dam-5662679/LS%20L29K_EN.pdf, Height=0.67mm, Mouser Price/Stock=https://www.mouser.co.uk/ProductDetail/OSRAM-Opto-Semiconductors/LS-L29K-G1J2-1-Z?qs=nTDll3UaDK6mUW9LNPY0Mw%3D%3D
LED_Amber200: library part ASMT-RA45-AP932, "LED", Manufacturer_Name="Avago Technologies", Mouser Part Number=630-ASMT-RA45-AP932, Datasheet Link=https://docs.broadcom.com/docs/AV02-0378EN, Height=0.55mm, Manufacturer_Part_Number=ASMT-RA45-AP932, Mouser Price/Stock=https://www.mouser.co.uk/ProductDetail/Broadcom-Avago/ASMT-RA45-AP932?qs=7zQgkplsu%2FO5gZneoB42ug%3D%3D
LED_Blue200: library part LB_Q39G-L2OO-35-1, "LED", Arrow Part Number="LB Q39G-L2OO-35-1", Manufacturer_Name=OSRAM, Mouser Part Number=720-LBQ39GL2N2351, Arrow Price/Stock=https://www.arrow.com/en/products/lbq39g-l2oo-35-1/osram-opto-semiconductors, Datasheet Link="http://www.mouser.com/ds/2/311/LB Q39G - CHIPLED 0603-553388.pdf", Height=0.4mm, Manufacturer_Part_Number="LB Q39G-L2OO-35-1", Mouser Price/Stock=https://www.mouser.co.uk/ProductDetail/OSRAM-Opto-Semiconductors/LB-Q39G-L2OO-35-1?qs=74fRo9GAWsxvZBH6a5xY%252BA%3D%3D
LED_Green200: library part LG_Q396-PS-35, "LED", Arrow Part Number="LG Q396-PS-35", Manufacturer_Name=OSRAM, Mouser Part Number=720-LGQ396A3964, Arrow Price/Stock=https://www.arrow.com/en/products/lgq396-ps-35/osram-opto-semiconductors, Datasheet Link=https://mouser.componentsearchengine.com/Datasheets/2/LG%20Q396-PS-35.pdf, Height=0.4mm, Manufacturer_Part_Number="LG Q396-PS-35", Mouser Price/Stock=https://www.mouser.co.uk/ProductDetail/OSRAM-Opto-Semiconductors/LG-Q396-PS-35?qs=xC%252BE9h5iuX5%252BCocujXxOpw%3D%3D
Q300 Q301 Q302 Q303 Q304 Q305: library part TPH2R506PL,L1Q, "MOSFET (N-Channel)", Manufacturer_Name=Toshiba, Mouser Part Number=757-TPH2R506PLL1Q, Arrow Part Number=TPH2R506PL,L1Q, Arrow Price/Stock=https://www.arrow.com/en/products/tph2r506pll1q/toshiba, Datasheet Link=http://toshiba.semicon-storage.com/info/docget.jsp?did=55522&prodName=TPH2R506PL, Height=1mm, Manufacturer_Part_Number=TPH2R506PL,L1Q, Mouser Price/Stock=https://www.mouser.co.uk/ProductDetail/Toshiba/TPH2R506PLL1Q?qs=bUPhaerQQeFGJjj6SxbPEQ%3D%3D
R100 R102 R211 R212 R216 R217 R302: library part RC0603FR-0710KL, "Resistor", Manufacturer_Name="YAGEO (PHYCOMP)", Mouser Part Number=603-RC0603FR-0710KL, Arrow Part Number=RC0603FR-0710KL, Arrow Price/Stock=https://www.arrow.com/en/products/rc0603fr-0710kl/yageo, Datasheet Link=http://www.yageo.com/documents/recent/PYu-RC0603_51_RoHS_L_v5.pdf, Height=0.55mm, Manufacturer_Part_Number=RC0603FR-0710KL, Mouser Price/Stock=https://www.mouser.co.uk/ProductDetail/Yageo/RC0603FR-0710KL?qs=grNVn54RoB%252B3GtjbJj3wJQ%3D%3D
R101 R205 R210 R215 R303: library part CRCW0603100RFKEAC, "Resistor", Manufacturer_Name=Vishay, Mouser Part Number=71-CRCW0603100RFKEAC, Arrow Part Number=CRCW0603100RFKEAC, Arrow Price/Stock=https://www.arrow.com/en/products/crcw0603100rfkeac/vishay, Datasheet Link=https://componentsearchengine.com/Datasheets/1/CRCW0603100RFKEAC.pdf, Height=0.55mm, Manufacturer_Part_Number=CRCW0603100RFKEAC, Mouser Price/Stock=https://www.mouser.co.uk/ProductDetail/Vishay-Dale/CRCW0603100RFKEAC/?qs=E3Y5ESvWgWPJqb4%2F19sAKw%3D%3D
R200 R201 R202 R207 R208 R209: library part CRCW06034K70JNEAC, "Resistor", Manufacturer_Name=Vishay, Mouser Part Number=71-CRCW06034K70JNEAC, Arrow Part Number=CRCW06034K70JNEAC, Arrow Price/Stock=https://www.arrow.com/en/products/crcw06034k70jneac/vishay, Datasheet Link=http://www.vishay.com/docs/28773/crcwce3.pdf, Height=0.55mm, Manufacturer_Part_Number=CRCW06034K70JNEAC, Mouser Price/Stock=https://www.mouser.co.uk/ProductDetail/Vishay-Dale/CRCW06034K70JNEAC/?qs=E3Y5ESvWgWMzBuUf0K3dnA%3D%3D
R203 R204 R214: library part ERJ1GNF1501C, "Resistor", Manufacturer_Name=Panasonic, Datasheet Link=https://industrial.panasonic.com/cdbs/www-data/pdf/RDA0000/AOA0000C84.pdf, Height=0.26mm, Manufacturer_Part_Number=ERJ1GNF1501C
R206: library part SFR03EZPF1500, "Resistor", Manufacturer_Name="ROHM Semiconductor", Mouser Part Number=755-SFR03EZPF1500, Datasheet Link=https://componentsearchengine.com/Datasheets/1/SFR03EZPF1500.pdf, Height=0.55mm, Manufacturer_Part_Number=SFR03EZPF1500, Mouser Price/Stock=https://www.mouser.com/Search/Refine.aspx?Keyword=755-SFR03EZPF1500
R213: library part ERJ1GNF1003C, "Resistor", Manufacturer_Name=Panasonic, Arrow Part Number=ERJ1GNF1003C, Arrow Price/Stock=https://www.arrow.com/en/products/erj1gnf1003c/panasonic, Datasheet Link=https://industrial.panasonic.com/cdbs/www-data/pdf/RDA0000/AOA0000C84.pdf, Height=0.26mm, Manufacturer_Part_Number=ERJ1GNF1003C
R300: library part RC0603FR-071ML, "Resistor", Manufacturer_Name="YAGEO (PHYCOMP)", Mouser Part Number=603-RC0603FR-071ML, Arrow Part Number=RC0603FR-071ML, Arrow Price/Stock=https://www.arrow.com/en/products/rc0603fr-071ml/yageo, Datasheet Link=https://www.yageo.com/upload/media/product/productsearch/datasheet/rchip/PYu-RC_Group_51_RoHS_L_11.pdf, Height=0.55mm, Manufacturer_Part_Number=RC0603FR-071ML, Mouser Price/Stock=https://www.mouser.co.uk/ProductDetail/Yageo/RC0603FR-071ML/?qs=VU8sRB4EgwDPceeQKB324w%3D%3D
R301 R304: library part WSK1216L5000FEA, "Resistor", Manufacturer_Name=Vishay, Datasheet Link=http://www.vishay.com/docs/30189/wsk1216.pdf, Height=1.9mm, Manufacturer_Part_Number=WSK1216L5000FEA
R305: library part RC0603FR-10470RL, "Resistor", Manufacturer_Name="YAGEO (PHYCOMP)", Mouser Part Number=603-RC0603FR-10470RL, Datasheet Link=http://www.yageo.com/documents/recent/PYu-RC0603_51_RoHS_L_v5.pdf, Height=0.55mm, Manufacturer_Part_Number=RC0603FR-10470RL, Mouser Price/Stock=https://www.mouser.co.uk/ProductDetail/Yageo/RC0603FR-10470RL?qs=EiqXWrxQq62gi8HBTlzDog%3D%3D
S100 S300: library part PTS647SK38SMTR2LFS, "Switch", Manufacturer_Name="C & K COMPONENTS", Mouser Part Number=611-PTS647SK38SMTR2L, Datasheet Link=https://www.ckswitches.com/media/2567/pts647.pdf, Height=3.8mm, Manufacturer_Part_Number=PTS647SK38SMTR2LFS, Mouser Price/Stock=https://www.mouser.co.uk/ProductDetail/CK/PTS647SK38SMTR2LFS/?qs=PqoDHHvF649Jgx1Ch2uMjg%3D%3D
SB100 SB101 SB102 SB103 SB104 SB105 SB106 SB107: Manufacturer=YAGEO, Manufacturer_Part_Number=RC0603JR-070RL, Package=SB0603, ComponentLink1Description=Datasheet, ComponentLink1URL=http://tunmcdsvn.tun.st.com/Component_Datasheet_Library/Trunk/Resistors/Yageo_Resistor_RC0603-series, ECCN_EU=n/a, ECCN_US=n/a, Internal_Part_Number=MCD-00071, Part_Type=Mechanical, Provided_By=SUBCO, Status=Released
U300: library part 74LVC1G11W6-7, "3 Input AND Gate", Manufacturer_Name="Diodes Inc.", Mouser Part Number=621-74LVC1G11W6-7, Arrow Part Number=74LVC1G11W6-7, Arrow Price/Stock=https://www.arrow.com/en/products/74lvc1g11w6-7/diodes-incorporated, Datasheet Link=https://www.diodes.com/assets/Datasheets/74LVC1G11.pdf, Height=1.4mm, Manufacturer_Part_Number=74LVC1G11W6-7, Mouser Price/Stock=https://www.mouser.com/Search/Refine.aspx?Keyword=621-74LVC1G11W6-7
XTL100: library part FOX924B-25, "25Mhz Oscillator"

## Free pads (board coordinates)
  round 6 hole 3.4: 2(3.5,3.5) 2(3.5,41.5) 2(41.5,3.5) 2(41.5,41.5) 2(78.5,3.5) 2(78.5,41.5)
  oval 1x1.5 hole 0.5: 3(31.369,2.286) 4(32.639,2.286) 5(33.909,2.286) 6(30.099,2.286) 7(28.829,2.286)
  oval 1.5x1 hole 0.5: 7(2.54,12.319) 7(2.54,13.589) 7(2.54,14.859) 7(2.54,16.129) 7(2.54,23.622) 7(2.54,24.892) 7(2.54,26.162) 7(2.54,27.432) 7(2.54,28.702) 7(2.54,29.972) 7(2.54,31.242) 7(2.54,32.512)
  round 1 smd: 8(18.669,41.91)

## Via types
v1: diameter 0.85, hole 0.45, Top Layer to Bottom Layer, tented both sides, 202 vias
v2: diameter 0.6, hole 0.3, Top Layer to Bottom Layer, tented both sides, 99 vias
v3: diameter 0.6, hole 0.3, Top Layer to Bottom Layer, 42 vias

## Nets (pads, with @x,y where several pads share a name; then routed paths per layer and width w, separated by ;. In a path a pad name is that pad's centre, name@x,y a point inside that pad or via, vN(x,y) a via of type N, cw(c..) or ccw(c..) an arc to the next point about the centre after c; other vN are vias at no path point)
3V3: "IC 100.2" "IC 100.13" "IC 100.43" "IC 100.52" "IC 100.55" "IC 100.61" "IC 100.72" C101.1 C103.2 C104.2 C105.2 C106.2 C107.2 C108.2 C109.2 C110.1 C200.2 IC100.2 IC100.4 IC101.6 IC101.16 IC200.8 J100.1 L100.1 pad.7@2.54,16.129 pad.8 R100.1 R102.2 R205.2 | length 25.7
  Top Layer w0.2: v2@10.481,18.075 11.691,18.075 ; v2(10.668,13.462) 10.757,13.462 10.97,13.675 11.691,13.675 ; v2(13.716,20.447) 13.75,20.413 13.75,20.032 13.891,19.891 13.891,19.075 ; 18.291,19.075 18.291,20.13 18.542,20.381 v2(18.542,20.447) ; 20.691,19.075 20.691,20.437 v2(20.701,20.447) ; 22.091,14.875 24.241,14.875 v2(24.257,14.859) ; R102.2@24.638,26.948 v2(24.638,27.813)
  Top Layer w0.25: v2(9.017,29.21) 9.41,29.603 IC101.6@10.638,29.603 ; IC101.16@12.188,32.153 12.193,32.158 v2(12.192,33.274) v2(12.192,33.274)
  Top Layer w0.3: C106.2@9.844,12.954 9.844,13.054 10.084,13.294 10.419,13.294 10.587,13.462 v2(10.668,13.462) ; v2(21.082,9.017) 21.123,9.058 IC200.8@22.301,9.058
  Top Layer w0.4: v2(10.287,18.161) C107.2@10.287,19.239 ; v2(13.716,20.447) C103.2@13.716,21.525 ; R205.2@15.913,43.561 16.764,43.561 ; v2(18.542,20.447) C104.2@18.542,21.525 ; C200.2@20.131,9.017 v2(21.082,9.017) ; v2(20.701,20.447) C105.2@20.701,21.525 ; v2(24.257,14.859) 24.311,14.859 24.565,14.605 C108.2@25.462,14.605 ; v1(27.051,26.543) L100.1@28.154,26.543 ; R100.1@28.256,34.798 v2(28.956,34.798)
  Top Layer w0.7: J100.1@4.913,16.099 v2(6.477,16.099)
  other v1: 22.987,23.876 19.883,34.742 21.026,34.742 22.169,34.742 23.312,34.742 19.883,35.885 23.312,35.885 23.312,37.028 19.883,38.171 23.312,38.171 19.883,39.314 21.026,39.314 22.169,39.314 23.312,39.314
+5: "IC 100.23" C100.1 C115.2 C116.1 C318.2 CON100.1 CON101.8 D200.2 IC100.3 IC300.24 J200.5 pad.5 pad.7@2.54,32.512 R200.1 R201.1 R202.1 R203.2 R204.2 R211.2 R212.1 | length 138
  Top Layer w0.2: 15.491,12.675 15.491,11.306 v2(15.494,11.303)
  Top Layer w0.3: IC300.24@40.12,28.223 v2@40.12,30.26
  Top Layer w0.4: R204.2@8.09,42.037 R203.2@8.09,40.513 7.89,40.313 7.89,39.894 7.112,39.116 7.112,35.179 7.583,34.708 C100.1@9.398,34.708 ; v2(10.922,3.81) R211.2@10.922,4.877 ; v2(13.97,3.81) R212.1@13.97,4.877 ; v2(15.494,11.303) C115.2@16.572,11.303 ; D200.2@18.984,4.615 18.984,3.549 19.05,3.483 v2(19.05,3.429) ; J200.5@33.869,5.594 33.889,5.574 33.889,4.211 v2(33.909,4.191) ; R201.1@36.741,8.001 v1(37.846,8.001) ; R202.1@36.741,9.779 v1(37.846,9.779) ; R200.1@36.741,11.557 v1(37.846,11.557) ; v2(40.259,30.48) C318.2@40.259,31.558
  Top Layer w0.9: v1(13.748,33.433) 13.748,34.671
  Mid Layer 2 w0.4: pad.5@33.909,2.286 v2(33.909,4.191) 33.909,6.804 34.036,6.931 v2(34.036,6.985)
  Bottom Layer w0.3: v1(37.846,8.001) 37.847,8.002 38.609,8.002 42.037,11.43 42.037,28.956 40.57,30.423 40.316,30.423 v2(40.259,30.48)
  Bottom Layer w0.6: v2(10.922,3.81) 10.922,2.286 ; v1(13.748,33.433) 13.748,27.337 8.509,22.098 8.509,10.795 ; v2(13.97,3.81) 13.97,2.286 ; v2(15.494,11.303) 14.986,10.795 ; v2(19.05,3.429) 19.05,2.637 18.699,2.286 13.97,2.286 ; v1(37.846,11.557) v1(37.846,9.779) v1(37.846,8.001) 36.83,6.985 v2(34.036,6.985) v2(23.622,6.985) v2(21.844,6.985) 18.796,6.985 14.986,10.795 ; 8.509,10.795 14.986,10.795 ; 8.509,10.795 8.509,2.921 9.144,2.286 10.922,2.286 ; 10.922,2.286 13.97,2.286
  other v1: 4.318,32.512 5.334,33.528 6.477,33.528
ADC_I0_N: "IC 100.17" R211.1 R216.1 | length 8.6
  Top Layer w0.2: R211.1@10.922,6.477 10.922,9.144 13.091,11.313 13.091,12.675
  Top Layer w0.4: R216.1@9.398,6.477 R211.1@10.922,6.477
ADC_I0_P: "IC 100.16" C204.2 R210.1 | length 72.1
  Top Layer w0.2: v2(10.287,9.906) 10.922,9.906 12.691,11.675 12.691,12.675
  Top Layer w0.25: R210.1@41.656,33.058 v2(41.656,34.163)
  Top Layer w0.4: C204.2@9.398,9.144 9.598,9.344 9.725,9.344 v2(10.287,9.906)
  Bottom Layer w0.3: v2(10.287,9.906) 10.287,7.747 12.827,5.207 37.846,5.207 43.561,10.922 43.561,33.147 44.069,33.655 44.069,34.671 43.815,34.925 42.291,34.925 41.85,34.484 41.85,34.23 v2@41.783,34.163
ADC_I1_N: "IC 100.19" R212.2 R217.1 | length 7.8
  Top Layer w0.2: 13.891,12.675 13.891,10.62 13.97,10.541 R212.2@13.97,6.477
  Top Layer w0.4: R217.1@12.446,6.477 R212.2@13.97,6.477
ADC_I1_P: "IC 100.18" C206.2 R215.1 | length 62.9
  Top Layer w0.2: v2(13.335,9.906) 13.335,10.014 13.491,10.17 13.491,12.675
  Top Layer w0.25: R215.1@43.18,33.058 v2(43.18,34.163)
  Top Layer w0.4: C206.2@12.446,9.144 12.646,9.344 12.773,9.344 v2(13.335,9.906)
  Bottom Layer w0.3: v2(13.335,9.906) 13.335,7.747 15.113,5.969 37.592,5.969 42.799,11.176 42.799,33.655 v2@43.307,34.163
ADC_IN_0: IC300.23 R210.2 | length 3.7
  Top Layer w0.3: IC300.23@40.62,28.223 40.62,29.444 41.656,30.48 R210.2@41.656,31.458
ADC_IN_1: IC300.22 R215.2 | length 4.7
  Top Layer w0.3: IC300.22@41.12,28.223 41.12,29.055 41.91,29.845 42.926,29.845 43.18,30.099 R215.2@43.18,31.458
ADC_VM: "IC 100.20" C205.2 D200.3 R213.1 R214.2 | length 45.8
  Top Layer w0.2: 14.291,12.675 14.291,11.109 15.367,10.033 C205.2@15.367,9.144
  Top Layer w0.4: C205.2@15.367,9.144 16.637,9.144 18.034,7.747 D200.3@18.034,6.815 D200.3@18.034,6.577 ; R214.2@15.494,6.477 17.934,6.477 D200.3@18.034,6.577 ; v2(18.034,1.27) D200.3@18.034,6.577 ; v1(42.291,8.001) R213.1@43.396,8.001
  Mid Layer 1 w0.4: v2(18.034,1.27) 23.876,1.27 24.892,2.286 24.892,4.699 25.908,5.715 37.846,5.715 40.132,8.001 v1(42.291,8.001)
CAL: "IC 100.70" IC300.31 | length 28.5
  Top Layer w0.2: 14.691,19.075 14.691,19.644 v2(15.494,20.447)
  Top Layer w0.3: v2(35.306,27.686) 35.387,27.686 35.55,27.523 IC300.31@36.42,27.523
  Bottom Layer w0.4: v2(15.494,20.447) 15.494,23.622 20.701,28.829 34.163,28.829 v2(35.306,27.686)
"CLK 25": "IC 100.51" XTL100.3
CS_bin_0: CON100.2 CON101.7 IC101.1 pad.7@2.54,31.242 | length 12.4
  Top Layer w0.25: CON100.2@5.84,31.192 7.57,31.192 9.588,33.21 11.367,33.21 11.688,32.889 IC101.1@11.688,32.153
  Top Layer w0.7: v1(4.318,31.242) 4.359,31.242 4.409,31.192 CON100.2@5.84,31.192
  Bottom Layer w0.7: pad.7@2.54,31.242 v1(4.318,31.242) 4.359,31.242 4.409,31.192 CON101.7@5.84,31.192
CS_bin_1: CON100.3 CON101.6 IC101.2 pad.7@2.54,29.972 | length 10.3
  Top Layer w0.25: CON100.3@5.84,29.942 7.336,29.942 8.997,31.603 IC101.2@10.638,31.603
  Top Layer w0.7: v1(4.318,29.972) 4.359,29.972 4.389,29.942 CON100.3@5.84,29.942
  Bottom Layer w0.7: pad.7@2.54,29.972 v1(4.318,29.972) 4.359,29.972 4.389,29.942 CON101.6@5.84,29.942
CS_bin_2: CON100.4 CON101.5 IC101.3 pad.7@2.54,28.702 | length 10.6
  Top Layer w0.24: CON100.4@5.84,28.692 7.102,28.692 9.513,31.103 IC101.3@10.638,31.103
  Top Layer w0.7: v1(4.318,28.702) 4.328,28.692 CON100.4@5.84,28.692
  Bottom Layer w0.7: pad.7@2.54,28.702 v1(4.318,28.702) 4.328,28.692 CON101.5@5.84,28.692
DVDD: C300.2 C304.2 C305.2 IC300.27 IC300.29 IC300.33 R302.1 R305.2 U300.5 | length 12.3
  Top Layer w0.2: v2(32.385,26.797) 33.11,26.797 C300.2@33.147,26.834
  Top Layer w0.25: R302.1@34.331,34.795 34.334,34.798 v2(35.502,34.798)
  Top Layer w0.3: C304.2@35.56,31.558 v2(35.56,30.48) 35.56,30.099 35.814,29.845 36.83,29.845 37.62,29.055 IC300.29@37.62,28.223 ; v2(38.481,30.48) 38.481,30.399 38.62,30.26 IC300.27@38.62,28.223
  Top Layer w0.4: U300.5@32.796,32.258 v2(34.036,32.258) ; v2(38.481,30.48) C305.2@38.481,31.558 ; R305.2@42.71,36.322 v2(43.688,36.322)
  other v2: 34.036,26.797